# Altium PCB NRF_Transciever.PcbDoc (part 2 of 2)
Units mm, origin at the board's own origin, x right, y up, seen from the top; angles counter-clockwise.
Board outline 46.03 x 45.87 mm, 4 copper layers (Top Layer, Layer 1, Layer 2, Bottom Layer), stack 1.021 mm thick; 129 components, 92 nets, 321 pads, 297 vias.
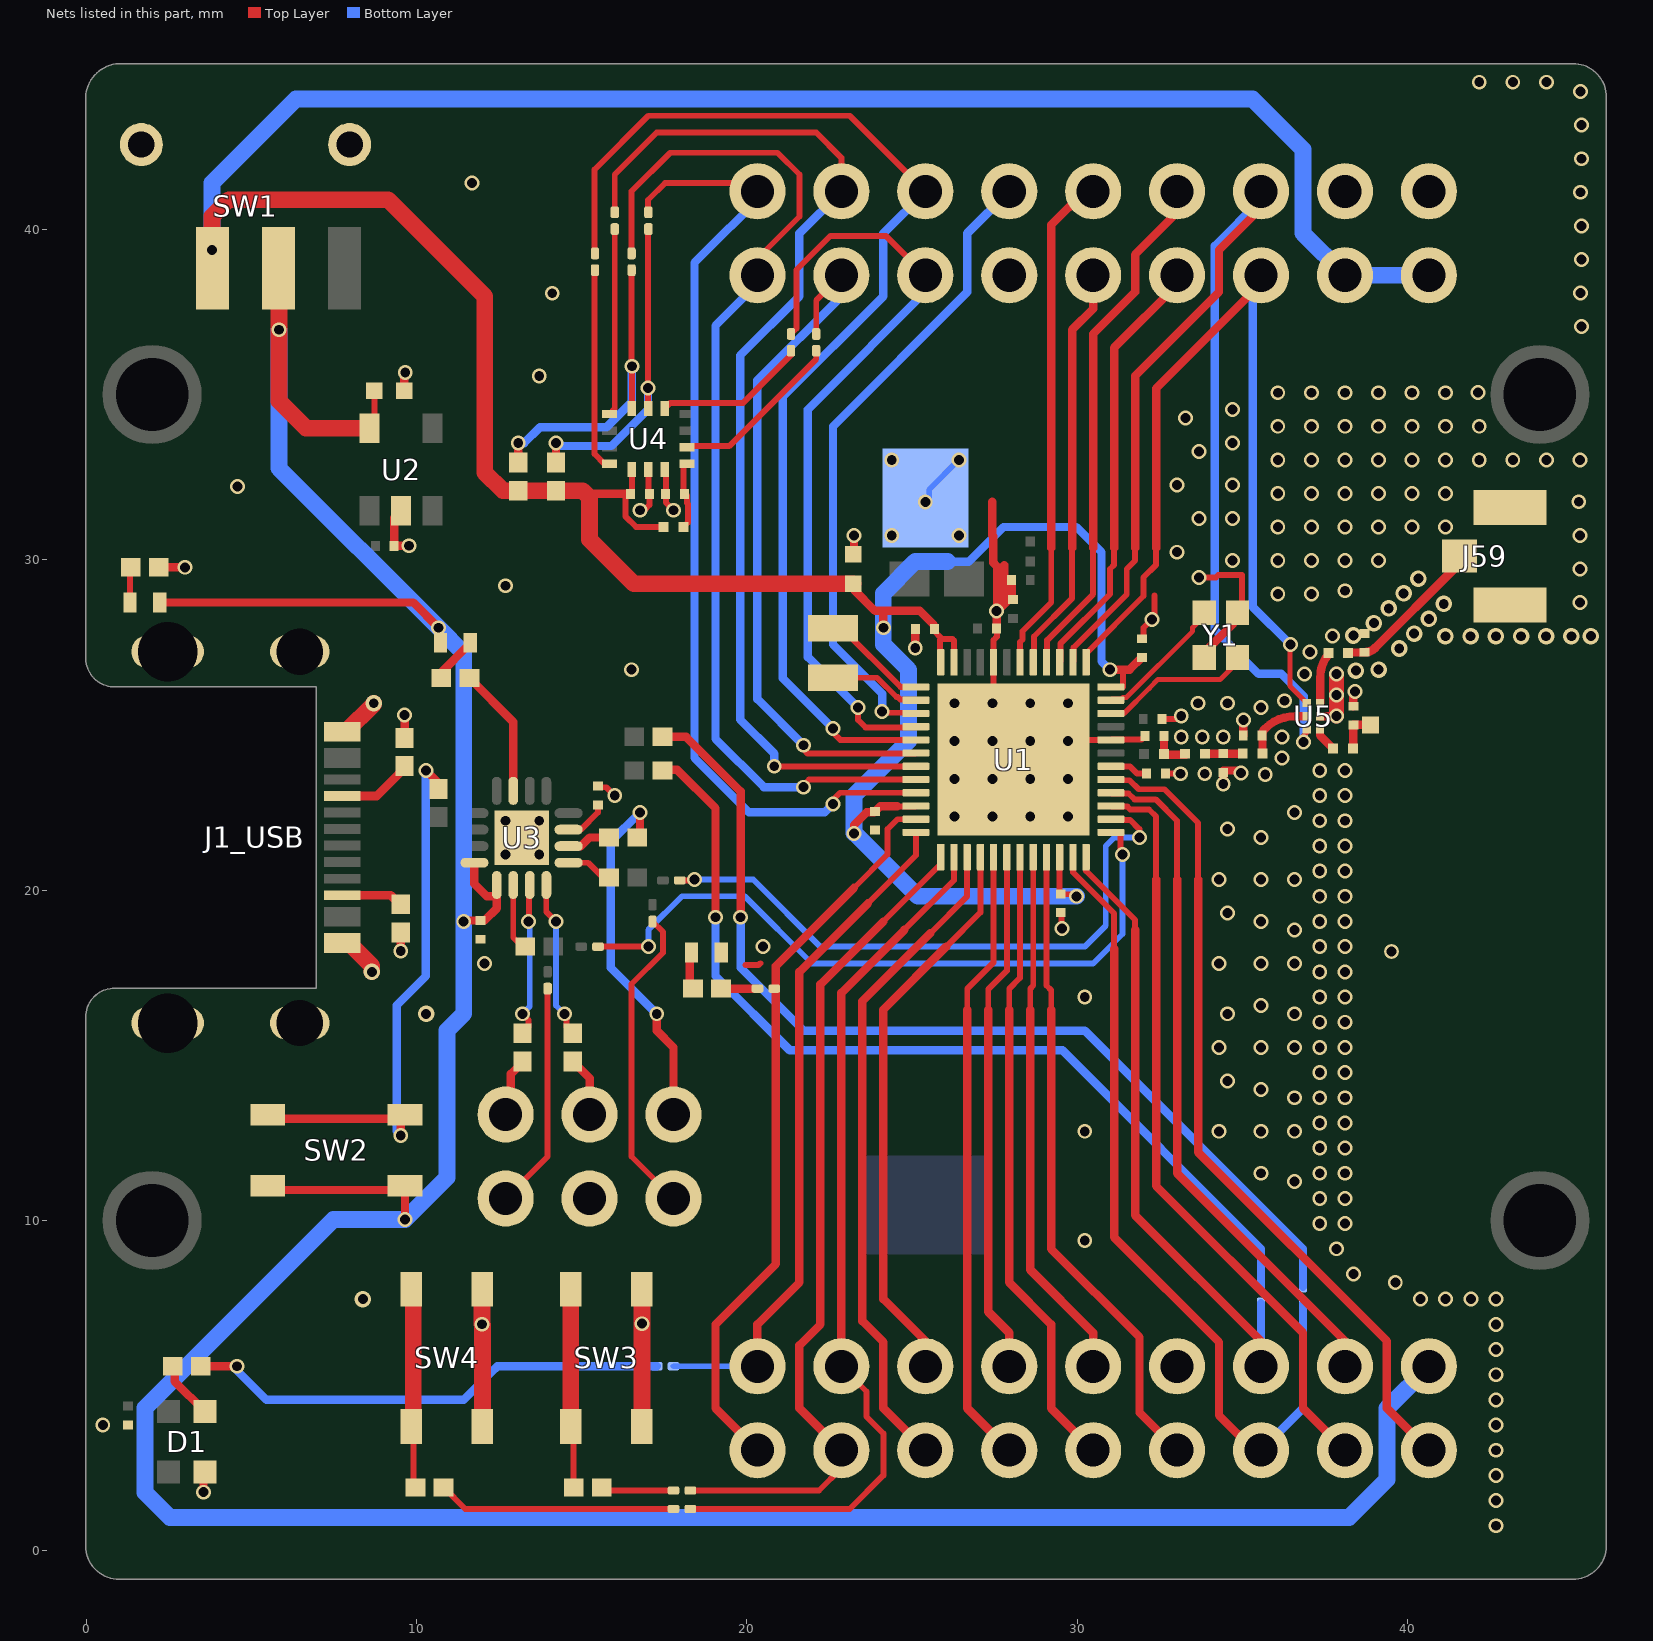
[diagram p4: the nets of this part, all layers, seen from the top]

## Via types
v1: diameter 0.45, hole 0.3, Top Layer to Bottom Layer, 263 vias
v2: diameter 0.5, hole 0.3, Top Layer to Bottom Layer, 34 vias

## Nets (pads, with @x,y where several pads share a name; then routed paths per layer and width w, separated by ;. In a path a pad name is that pad's centre, name@x,y a point inside that pad or via, vN(x,y) a via of type N, cw(c..) or ccw(c..) an arc to the next point about the centre after c; other vN are vias at no path point) (continued)
GND: A1.2 BT1.1 C1.1 C2.1 C3.1 C4.1 C5.1 C6.1 C7.1 C8.1 C9.1 C10.1 C11.1 C12.1 C13.1 C14.1 C15.1 C16.1 C17.1 C18.1 C19.1 C20.1 C21.1 C22.1 D1.2 DS3.2 J1_USB.1 J1_USB.2 J1_USB.3 J1_USB.4 J1_USB.A1-B12 J1_USB.B1-A12 J18.1 J19.1 J35.1 J36.1 J50.1 J59.2 J59.3 R2.1 R3.1 R7.1 SW1.4 SW1.5 SW3.3 SW3.4 SW4.3 SW4.4 U1.32 U1.44 U1.49 U2.2 U3.17 U4.6 U4.7 U5.2 Y1.2 Y1.4 | length 50.4
  Top Layer w0.178: C17.1@15.498,23.114 15.748,23.114 v1(16.002,22.86) ; v1(16.764,31.496) 16.891,31.496 17.049,31.654 C18.1@17.049,31.989 ; U4.6@17.018,32.73 17.018,32.01 C18.1@17.039,31.989 ; U4.7@17.518,32.73 17.547,32.701 17.547,31.729 v1(17.78,31.496) ; 19.959,17.735 20.355,17.735 20.407,17.787 ; v2(27.432,25.654) 27.838,25.248 U1.49@28.017,25.248 ; C6.1@27.565,27.915 27.565,27.666 27.467,27.568 U1.44@27.467,26.895 27.467,25.654 27.432,25.619 v2(27.432,24.511) 27.559,24.511 28.067,24.003 U1.49@28.067,23.945 ; U1.49@28.144,23.92 28.738,24.514 U1.49@29.287,24.514 ; U1.49@29.287,23.978 29.389,23.876 29.433,23.876 U1.49@30.096,24.539 ; C4.1@29.503,19.321 29.521,19.304 29.521,18.857 v1(29.542,18.835) ; U1.49@30.102,24.545 U1.32@31.017,24.545 31.031,24.56 31.947,24.56 C7.1@31.996,24.608 ; C2.1@32.004,27.707 32.004,27.94 v1(32.258,28.194) 32.336,28.272 32.336,28.914 ; C12.1@32.567,25.176 33.05,25.176 v1(33.147,25.273) ; C13.1@32.654,23.523 33.119,23.523 v1(33.122,23.52) ; v1(33.684,29.464) 34.193,29.464 34.265,29.535 34.981,29.535 34.981,28.528 Y1.4@34.843,28.39
  Top Layer w0.254: R2.1@2.203,29.769 v1(2.997,29.769) ; v1(3.556,1.778) D1.2@3.556,2.286 ; C15.1@9.325,30.415 9.325,31.271 U2.2@9.533,31.478 ; C15.1@9.333,30.415 9.768,30.415 v1(9.774,30.421) ; v1(9.525,18.161) R7.1@9.525,18.721 ; C14.1@9.628,35.11 9.628,35.638 v1(9.66,35.669) ; R3.1@9.643,24.604 v1(9.643,25.301) ; C1.1@23.241,30.168 v1(23.241,30.734) ; v1(25.095,27.33) C5.1@25.095,27.887 ; v2(26.289,25.654) 26.543,25.4 27.178,25.4 v2(27.432,25.654) ; 27.432,31.75 27.432,30.734 27.461,30.705 27.461,29.906 27.575,29.792 27.575,28.464 v1(27.559,28.448) ; C6.1@27.565,27.915 27.565,28.442 v1(27.559,28.448) ; 27.791,28.758 27.791,29.84 ; C11.1@28.015,28.814 C10.1@28.015,29.275 ; C11.1@28.049,28.781 27.919,28.781 27.586,28.448 v1(27.559,28.448) ; Y1.2@33.843,27.04 33.843,27.191 34.722,28.07 34.722,28.269 Y1.4@34.843,28.39 ; v1(34.417,23.216) 34.417,23.618 34.878,23.618 v1(34.95,23.546) ; C9.1@35.021,24.673 35.021,25.141 v1(35.027,25.146) ; U5.2@37.346,25.263 37.836,25.263 v1(37.846,25.273) ; C22.1@38.354,25.564 v1@38.357,26.003
  Top Layer w0.457: v1(37.846,25.273) v1(37.846,26.543)
  Top Layer w0.508: J1_USB.B1-A12@7.62,18.394 7.956,18.394 8.649,17.701 v2(8.649,17.526) ; J1_USB.A1-B12@7.62,24.794 7.87,24.794 8.709,25.633 v2(8.709,25.654) ; SW4.4@11.984,7.853 v1(11.984,6.862) 12,6.846 SW4.3@12,3.77 ; SW3.3@16.823,3.767 v1@16.823,6.871 ; SW3.4@16.823,7.917 16.823,6.883 v1(16.829,6.877)
  Bottom Layer w0.178: BT1.1@25.4,31.868 25.518,31.868 25.518,32.122 v1(26.416,33.02)
  other v1: 42.672,0.762 42.672,1.524 42.672,2.286 42.672,3.048 0.508,3.81 42.672,3.81 42.672,4.572 42.672,5.334 42.672,6.096 42.672,6.858 40.386,7.62 41.148,7.62 41.91,7.62 42.672,7.62 39.624,8.128 38.354,8.382 37.846,9.144 30.226,9.398 37.338,9.906 38.1,9.906 37.338,10.668 38.1,10.668 36.576,11.176 35.56,11.43 37.338,11.43 38.1,11.43 37.338,12.192 38.1,12.192 30.226,12.7 34.29,12.7 35.56,12.7 36.576,12.7 37.338,12.954 38.1,12.954 36.576,13.716 37.338,13.716 38.1,13.716 35.56,13.97 34.544,14.224 37.338,14.478 38.1,14.478 34.29,15.24 35.56,15.24 36.576,15.24 37.338,15.24 38.1,15.24 37.338,16.002 38.1,16.002 34.544,16.256 36.576,16.256 35.56,16.51 30.226,16.764 37.338,16.764 38.1,16.764 37.338,17.526 38.1,17.526 12.065,17.78 34.29,17.78 35.56,17.78 36.576,17.78 20.49,18.295 37.338,18.288 38.1,18.288 36.576,18.796 35.56,19.05 37.338,19.05 38.1,19.05 34.544,19.304 37.338,19.812 38.1,19.812 34.29,20.32 35.56,20.32 36.576,20.32 37.338,20.574 38.1,20.574 12.7,21.082 13.716,21.082 37.338,21.336 38.1,21.336 35.56,21.59 34.544,21.844 12.7,22.098 13.716,22.098 37.338,22.098 38.1,22.098 28.575,22.225 36.576,22.352 37.338,22.86 38.1,22.86 28.575,23.368 35.687,23.495 33.858,23.52 37.338,23.622 38.1,23.622 36.195,24.003 28.575,24.511 33.147,24.638 33.782,24.638 34.417,24.638 36.195,24.638 35.56,25.527 28.575,25.654 33.655,25.654 34.544,25.654 36.272,25.731 37.846,25.908 38.405,26.01 36.877,26.543 16.51,26.67 37.046,27.201 37.719,27.686 45.212,28.702 36.068,28.956 37.084,28.956 38.098,29.06 12.7,29.21 45.212,29.718 34.7,29.972 36.068,29.972 37.084,29.972 38.1,29.972 39.116,29.972 33.02,30.226 24.384,30.734 26.416,30.734 45.212,30.734 36.068,30.988 37.084,30.988 38.1,30.988 39.116,30.988 40.132,30.988 41.148,30.988 33.684,31.242 34.7,31.242 25.4,31.75 45.176,31.753 36.068,32.004 37.084,32.004 38.1,32.004 39.116,32.004 40.132,32.004 41.148,32.004 4.585,32.209 33.02,32.258 34.7,32.258 24.384,33.02 36.068,33.02 37.084,33.02 38.1,33.02 39.116,33.02 40.132,33.02 41.148,33.02 42.164,33.02 43.18,33.02 44.196,33.02 45.212,33.02 33.684,33.269 34.7,33.528 36.068,34.036 37.084,34.036 38.1,34.036 39.116,34.036 40.132,34.036 41.148,34.036 42.164,34.036 33.274,34.29 34.7,34.544 36.068,35.052 37.084,35.052 38.1,35.052 39.116,35.052 40.132,35.052 41.148,35.052 42.128,35.055 13.716,35.56 45.264,37.053 14.11,38.064 45.228,38.072 45.264,39.085 45.264,40.101 45.228,41.12 11.684,41.402 45.264,42.133 45.264,43.149 45.228,44.168 42.164,44.45 43.18,44.45 44.196,44.45
  other v2: 8.382,7.62 10.291,16.256 26.289,22.225 27.432,22.225 29.718,22.225 26.289,23.368 27.432,23.368 29.718,23.368 26.289,24.511 29.718,24.511 29.718,25.654 38.43,26.645 39.116,26.67 39.745,27.311 41.143,27.683 41.905,27.683 42.667,27.683 43.429,27.683 44.191,27.683 44.953,27.683 45.542,27.686 38.354,27.705 40.194,27.76 38.977,28.079 40.643,28.209 39.426,28.528 41.092,28.658 39.875,28.977 40.324,29.426
IMU_CSB: J39.1 U4.12 | length 4.5
  Top Layer w0.178: U4.12@17.518,34.58 17.684,34.746 19.887,34.746 J39.1@21.374,36.233
IMU_SCL: J37.1 R13.1 U4.13 | length 9.9
  Top Layer w0.178: J37.1@17.008,39.896 v1(17.008,35.198) 17.008,34.634 U4.13@17.018,34.624
  Top Layer w0.254: R13.1@14.224,32.937 v1(14.224,33.528)
  Bottom Layer w0.254: v1(14.224,33.528) 14.204,33.508 14.204,33.439 15.897,33.439 17.008,34.55 v1(17.008,35.198)
IMU_SDA: J38.1 R14.1 U4.14 | length 10
  Top Layer w0.178: J38.1@16.51,38.829 16.51,35.86 v1(16.518,35.852) U4.14@16.518,34.58
  Top Layer w0.254: R14.1@13.081,32.937 13.208,33.064 13.081,33.191 v1(13.081,33.528)
  Bottom Layer w0.254: v1(13.081,33.528) 13.261,33.528 13.74,34.007 15.746,34.007 16.518,34.779 v1(16.518,35.852)
NetC7_2: C7.2 L2.2 L3.1 | length 1.2
  Top Layer w0.254: L2.2@32.625,24.12 C7.2@32.625,24.663 ; L2.2@32.672,24.101 L3.1@33.287,24.101
NetC8_2: C8.2 L3.2 L4.1 | length 1.1
  Top Layer w0.254: L3.2@33.942,24.127 34.615,24.127 L4.1@35.006,24.127
NetC13_2: C13.2 U1.30 | length 1.2
  Top Layer w0.178: U1.30@31.017,23.745 31.592,23.745 31.814,23.523 C13.2@32.104,23.523
NetC17_2: C17.2 U3.7 | length 1.3
  Top Layer w0.178: U3.7@14.605,21.828 14.97,21.828 15.494,22.352 C17.2@15.494,22.575
NetD1_3: D1.3 R16.2 | length 1.5
  Top Layer w0.254: 2.683,5.302 2.683,5.132 D1.3@3.598,4.217
NetDS1_2: DS1.2 R2.2 | length 1
  Top Layer w0.178: DS1.2@1.328,28.702 1.328,29.693 R2.2@1.353,29.718
NetDS2_2: DS2.2 R12.2 | length 1.3
  Top Layer w0.254: R12.2@10.751,26.416 10.751,26.584 DS2.2@11.549,27.382
NetDS3_1: DS3.1 R17.1 | length 1.2
  Top Layer w0.254: R17.1@18.244,17.018 R17.1@18.315,16.948 ; DS3.1@18.271,18.04 18.271,17.118 R17.1@18.371,17.018
NetJ1_USB_A5: J1_USB.A5 R3.2 | length 2.2
  Top Layer w0.267: J1_USB.A5@7.62,22.844 8.791,22.844 9.475,23.528 R3.2@9.525,23.578
NetJ1_USB_B5: J1_USB.B5 R7.2 | length 2
  Top Layer w0.267: J1_USB.B5@7.62,19.844 9.223,19.844 R7.2@9.496,19.571
NetJ40_2: J40.2 U4.1 | length 5.7
  Top Layer w0.178: U4.1@15.843,34.405 16.002,34.564 J40.2@16.002,40
NetJ41_1: J41.1 U4.9 | length 5.1
  Top Layer w0.178: U4.9@18.319,33.434 19.464,33.434 22.098,36.068 J41.1@22.098,36.322
NetJ42_2: J42.2 U4.4 | length 5.9
  Top Layer w0.178: 15.392,38.57 15.392,33.2 15.688,32.905 U4.4@15.843,32.905
NetJ43_2: J43.2 R17.2 | length 1.1
  Top Layer w0.254: R17.2@19.221,17.018 J43.2@20.32,17.018
NetJ44_2: J44.2 R16.1 | length 14.8
  Top Layer w0.254: R16.1@3.361,5.588 v1(4.572,5.588)
  Bottom Layer w0.254: v1(4.572,5.588) 4.572,5.461 5.461,4.572 11.43,4.572 12.192,5.334 12.268,5.41 12.446,5.588 J44.2@17.272,5.588
NetJ45_2: J45.2 R18.2 | length 2.3
  Top Layer w0.178: R18.2@15.545,1.95 15.666,1.829 J45.2@17.78,1.829
NetJ46_2: J46.2 R19.2 | length 7.2
  Top Layer w0.178: R19.2@10.822,1.923 11.475,1.27 J46.2@17.78,1.27
NetJ48_1: J48.1 J55.1 | length 9.4
  Top Layer w0.178: J55.1@17.145,19.05 17.459,18.736 17.459,18.105 16.51,17.156 16.51,11.938 J48.1@17.78,10.668
NetJ52_1: J52.1 J56.1 | length 6.9
  Top Layer w0.178: J52.1@12.7,10.668 13.97,11.938 J56.1@13.97,17.018
NetJ53_1: J53.1 U1.26 | length 18.8
  Top Layer w0.178: J53.1@17.969,20.292 18.387,20.292 v1(18.415,20.32) ; U1.26@31.017,22.145 31.038,22.124 31.597,22.124 31.877,21.844 v1(31.877,21.59)
  Bottom Layer w0.178: v1(18.415,20.32) 20.193,20.32 22.225,18.288 30.226,18.288 30.861,18.923 30.861,21.336 31.115,21.59 v1(31.877,21.59)
NetJ54_1: J54.1 U1.25 | length 21.4
  Top Layer w0.178: J54.1@15.494,18.288 v1(17.018,18.288) ; U1.25@31.017,21.745 31.284,21.745 31.306,21.724 31.306,21.092 31.316,21.082 v1(31.369,21.082)
  Bottom Layer w0.178: v1(17.018,18.288) 17.018,18.796 18.034,19.812 19.939,19.812 21.971,17.78 30.48,17.78 31.369,18.669 v1(31.369,21.082)
NetJ57_2: J57.2 R10.2 | length 30.1
  Top Layer w0.254: R10.2@17.443,24.638 18.161,24.638 19.812,22.987 v1(19.812,19.177)
  Bottom Layer w0.254: v1(19.812,19.177) 19.812,17.653 21.717,15.748 30.226,15.748 36.83,9.144 J57.2@36.83,8.001
NetJ58_2: J58.2 R11.1 | length 28.2
  Top Layer w0.254: R11.1@17.443,23.622 17.457,23.636 17.893,23.636 19.05,22.479 v1(19.05,19.177)
  Bottom Layer w0.254: v1(19.05,19.177) 19.05,17.399 21.297,15.152 29.552,15.152 35.56,9.144 J58.2@35.56,8.001
NetL7_1: L7.1 U5.3 | length 1.5
  Top Layer w0.254: U5.3@37.346,25.663 37.356,25.673 37.356,26.446 cw(c38.597,26.446) 37.368,26.62 cw(c38.339,26.483) L7.1@37.614,27.142
NetL8_1: L8.1 U5.1 | length 0.7
  Top Layer w0.254: U5.1@37.346,24.863 37.346,24.681 L8.1@37.744,24.282
NetR4_1: R4.1 U3.4 | length 4.8
  Top Layer w0.178: U3.4@13.93,20.153 13.93,19.344 v1(14.224,19.05) ; v1(14.478,16.256) 14.478,16.182 14.546,16.114 14.546,15.851 R4.1@14.732,15.665
  Bottom Layer w0.178: v1(14.224,19.05) 14.224,16.51 v1(14.478,16.256)
NetR5_1: R5.1 U3.3 | length 4.8
  Top Layer w0.178: R5.1@13.208,15.665 13.394,15.851 13.394,16.07 v1(13.208,16.256) ; v1(13.393,19.05) 13.412,19.069 13.412,20.135 U3.3@13.43,20.153
  Bottom Layer w0.178: v1(13.208,16.256) 13.428,16.476 13.428,19.015 v1(13.393,19.05)
NetR6_1: R6.1 U3.2 | length 2
  Top Layer w0.178: U3.2@12.93,20.153 12.93,18.566 R6.1@13.208,18.288
NetR8_1: R8.1 U3.5 | length 1.4
  Top Layer w0.178: U3.5@14.605,20.828 15.196,20.828 15.639,20.385 R8.1@15.831,20.385
NetR9_1: R9.1 U3.6 | length 1.3
  Top Layer w0.254: U3.6@14.605,21.328 14.978,21.328 15.24,21.59 R9.1@15.831,21.59
NetR12_1: R12.1 U3.11 | length 4
  Top Layer w0.254: R12.1@11.601,26.416 12.93,25.087 U3.11@12.93,23.003
NetR15_2: R15.2 SW2.1 SW2.2 | length 17.1
  Top Layer w0.254: SW2.1@5.502,13.199 5.62,13.081 9.534,13.081 SW2.2@9.652,13.199 9.525,13.072 v1(9.525,12.573) ; v1(10.287,23.622) 10.672,23.237 R15.2@10.672,23.061
  Bottom Layer w0.254: v1(9.525,12.573) 9.398,12.7 9.398,16.51 10.287,17.399 v1(10.287,23.622)
NetR18_1: R18.1 SW3.1 SW3.2 | length 6
  Top Layer w0.178: SW3.1@14.673,3.767 14.758,3.682 R18.1@14.758,1.923
  Top Layer w0.508: SW3.1@14.673,3.767 SW3.2@14.673,7.917
NetR19_1: R19.1 SW4.1 SW4.2 | length 5.5
  Top Layer w0.178: R19.1@9.906,1.945 SW4.1@9.906,3.556
  Top Layer w0.508: SW4.1@9.906,3.556 SW4.2@9.906,7.467
NetU1_1: U1.1 Y2.2 | length 3.2
  Top Layer w0.178: Y2.2@22.606,27.928 22.872,27.928 24.655,26.145 U1.1@25.117,26.145
NetU1_2: U1.2 Y2.1 | length 2.8
  Top Layer w0.178: Y2.1@22.606,26.428 23.941,26.428 24.528,25.841 24.567,25.841 24.641,25.767 25.096,25.767 U1.2@25.117,25.745
P0.02: J25.1 U1.27 | length 23
  Top Layer w0.178: U1.27@31.017,22.545 31.038,22.524 31.52,22.524 31.603,22.441 32.169,22.441 32.385,22.225 32.385,20.32
  Top Layer w0.254: 32.385,20.32 32.385,11.049 36.83,6.604 36.83,4.318 J25.1@38.1,3.048
P0.03: J28.1 U1.28 | length 21
  Top Layer w0.178: U1.28@31.017,22.945 31.038,22.924 31.551,22.924 31.729,22.746 32.372,22.746 33.02,22.098 33.02,20.32
  Top Layer w0.254: 33.02,20.32 33.02,11.43 38.1,6.35 J28.1@38.1,5.588
P0.04: J30.1 U1.29 | length 25.1
  Top Layer w0.178: U1.29@31.017,23.345 31.038,23.324 31.582,23.324 31.856,23.05 32.639,23.05 33.655,22.034 33.655,20.32
  Top Layer w0.254: 33.655,20.32 33.655,12.065 39.37,6.35 39.37,4.318 J30.1@40.64,3.048
P1.02: J1.1 U1.3 | length 19.6
  Top Layer w0.178: v1(24.092,25.4) 24.126,25.367 25.096,25.367 U1.3@25.117,25.345
  Bottom Layer w0.254: v1(24.092,25.4) 24.092,25.946 22.606,27.432 22.606,34.036 26.67,38.1 26.67,39.878 J1.1@27.94,41.148
P1.03: J3.1 J39.2 U1.4 | length 24.5
  Top Layer w0.178: J39.2@21.336,36.83 21.499,36.993 21.499,38.771 22.529,39.801 24.207,39.801 J3.1@25.4,38.608 ; v1(23.368,25.527) 23.368,25.146 23.588,24.926 25.097,24.926 U1.4@25.117,24.945
  Bottom Layer w0.254: v1(23.368,25.527) 21.844,27.051 21.844,34.544 25.653,38.353 J3.1@25.4,38.606
P1.04: J5.1 J42.1 U1.5 | length 35.5
  Top Layer w0.178: J42.1@15.392,39.378 15.392,41.808 17.018,43.434 23.114,43.434 J5.1@25.4,41.148 ; v1(22.606,24.892) 22.606,24.765 22.826,24.545 25.108,24.545 U1.5@25.113,24.541
  Bottom Layer w0.254: v1(22.606,24.892) 21.082,26.416 21.082,34.925 24.13,37.973 24.13,39.878 J5.1@25.4,41.148
P1.05: J7.1 J41.2 U1.6 | length 21.3
  Top Layer w0.178: v1(21.717,24.384) 21.717,24.257 21.844,24.13 25.102,24.13 U1.6@25.117,24.145 ; 22.099,37.02 22.099,37.847 J7.1@22.86,38.608
  Bottom Layer w0.254: v1(21.717,24.384) 20.32,25.781 20.32,35.433 22.86,37.973 J7.1@22.86,38.608
P1.06: J9.1 J40.1 U1.7 | length 33.2
  Top Layer w0.178: J40.1@16.002,40.513 16.002,41.656 17.272,42.926 22.098,42.926 22.86,42.164 J9.1@22.86,41.148 ; v1(20.83,23.747) v1(20.83,23.747) U1.7@25.117,23.745
  Bottom Layer w0.254: v1(20.83,23.747) 20.83,24.128 19.796,25.162 19.796,36.179 21.59,37.973 21.59,39.878 J9.1@22.86,41.148
P1.07: J11.1 J38.2 U1.8 | length 32.3
  Top Layer w0.178: J38.2@16.51,39.37 16.51,41.148 17.678,42.316 20.93,42.316 21.59,41.656 21.59,40.386 20.32,39.116 J11.1@20.32,38.608 ; v1(21.717,23.114) 21.717,23.178 21.885,23.345 U1.8@25.117,23.345
  Bottom Layer w0.254: J11.1@20.32,38.354 19.05,37.084 19.05,24.576 20.512,23.114 v1(21.717,23.114)
P1.08: J13.1 J37.2 U1.9 | length 29.8
  Top Layer w0.178: J37.2@17.018,40.513 17.008,40.523 17.008,40.884 17.526,41.402 20.066,41.402 J13.1@20.32,41.148 ; v1(22.606,22.606) 22.606,22.733 22.818,22.945 U1.9@25.117,22.945
  Bottom Layer w0.254: J13.1@20.574,41.148 18.415,38.989 18.415,24.003 20.066,22.352 22.352,22.352 v1(22.606,22.606)
P1.09: J15.1 U1.37 U5.4 | length 27.6
  Top Layer w0.152: v1(36.449,27.432) 36.436,27.419 36.436,26.173 U5.4@36.946,25.663
  Top Layer w0.178: U1.37@30.267,26.895 30.267,27.163 32.004,28.9 32.004,29.464 32.385,29.845 32.385,30.353
  Top Layer w0.254: 32.385,30.353 32.385,35.179 35.56,38.354 J15.1@35.56,38.608
  Bottom Layer w0.254: J15.1@35.56,38.608 35.306,38.354 35.306,28.575 v1(36.449,27.432)
P1.10: J20.1 U1.38 U5.6 | length 35.9
  Top Layer w0.152: v1(36.848,24.476) 36.848,24.483 36.754,24.578 36.946,24.77 U5.6@36.946,24.863
  Top Layer w0.178: U1.38@29.867,26.895 29.888,26.917 29.888,27.341 31.496,28.948 31.496,29.718 31.75,29.972 31.75,30.353
  Top Layer w0.254: 31.75,30.353 31.75,35.56 34.29,38.1 34.29,39.37 35.56,40.64 J20.1@35.56,41.148
  Bottom Layer w0.254: J20.1@35.56,41.148 35.56,40.894 34.163,39.497 34.163,29.832 34.163,27.866 35.486,26.543 36.175,26.543 36.848,25.87 v1(36.848,24.476)
P1.11: J23.1 U1.39 | length 13.2
  Top Layer w0.178: U1.39@29.467,26.895 29.488,26.917 29.488,27.456 30.988,28.956 30.988,29.718 31.115,29.845 31.115,30.353
  Top Layer w0.254: 31.115,30.353 31.115,36.413 33.02,38.318 J23.1@33.02,38.608
P1.12: J26.1 U1.40 | length 15.9
  Top Layer w0.178: U1.40@29.067,26.895 29.088,26.917 29.088,27.564 30.48,28.956 30.48,30.353
  Top Layer w0.254: 30.48,30.353 30.48,36.83 31.75,38.1 31.75,39.231 33.02,40.501 J26.1@33.02,41.148
P1.13: J29.1 U1.41 | length 12.5
  Top Layer w0.178: U1.41@28.667,26.895 28.688,26.917 28.688,27.672 29.845,28.829 29.845,30.353
  Top Layer w0.254: 29.845,30.353 29.845,36.957 30.48,37.592 J29.1@30.48,38.608
P1.14: J31.1 U1.42 | length 15.3
  Top Layer w0.178: U1.42@28.267,26.895 28.267,27.506 28.341,27.58 28.341,27.833 29.21,28.702 29.21,30.353
  Top Layer w0.254: 29.21,30.353 29.21,40.132 30.226,41.148 J31.1@30.48,41.148
P2.00: J2.1 J43.1 U1.11 | length 22.5
  Top Layer w0.178: 23.241,20.066 24.257,21.082 24.257,21.844 24.558,22.145 U1.11@25.117,22.145
  Top Layer w0.254: J2.1@20.32,3.048 19.05,4.318 19.05,6.858 20.879,8.687 20.879,11.684 20.879,13.462 20.879,13.598 20.879,14.342 20.879,17.154 20.879,17.704 23.241,20.066
P2.01: J4.1 J44.1 U1.12 | length 20.7
  Top Layer w0.178: 23.664,19.6 25.117,21.053 U1.12@25.117,21.745
  Top Layer w0.254: J4.1@20.32,5.588 20.32,6.858 21.59,8.128 21.59,17.526 23.664,19.6
  Bottom Layer w0.178: J44.1@17.78,5.588 J4.1@20.32,5.588
P2.02: J6.1 J45.1 U1.13 | length 25.6
  Top Layer w0.152: J6.1@22.86,2.504 J6.1@22.86,3.048
  Top Layer w0.178: J45.1@18.288,1.829 22.185,1.829 J6.1@22.86,2.504 ; 24.13,19.05 25.867,20.787 U1.13@25.867,20.995
  Top Layer w0.254: J6.1@22.86,3.048 21.59,4.318 21.59,6.223 22.225,6.858 22.225,17.145 24.13,19.05
P2.03: J8.1 J46.1 U1.14 | length 26.9
  Top Layer w0.178: J46.1@18.288,1.27 23.114,1.27 24.13,2.286 24.13,3.556 23.622,4.064 23.622,4.826 J8.1@22.86,5.588 ; 24.765,18.796 26.267,20.298 U1.14@26.267,20.995
  Top Layer w0.254: J8.1@22.86,5.588 22.86,16.891 24.765,18.796
P2.04: J10.1 U1.15 | length 20.1
  Top Layer w0.178: 25.547,18.689 26.667,19.809 U1.15@26.667,20.995
  Top Layer w0.254: J10.1@25.4,3.048 24.13,4.318 24.13,6.319 23.495,6.954 23.495,16.637 25.547,18.689
P2.05: J12.1 U1.16 | length 17.2
  Top Layer w0.178: 26.035,18.288 27.067,19.32 U1.16@27.067,20.995
  Top Layer w0.254: J12.1@25.4,5.588 25.4,6.35 24.13,7.62 24.13,16.383 26.035,18.288
P2.06: J14.1 U1.17 | length 18.8
  Top Layer w0.178: 26.67,16.384 26.67,17.018 27.467,17.815 U1.17@27.467,20.995
  Top Layer w0.254: 26.67,16.384 26.67,4.318 J14.1@27.94,3.048
P2.07: J16.1 U1.18 | length 15.9
  Top Layer w0.178: 27.305,16.383 27.305,16.998 27.867,17.56 U1.18@27.867,20.995
  Top Layer w0.254: 27.305,16.383 27.305,7.239 27.94,6.604 J16.1@27.94,5.588
P2.08: J21.1 U1.19 | length 19.1
  Top Layer w0.178: 27.94,16.383 27.94,17.018 28.267,17.345 28.267,19.254 U1.19@28.267,20.995
  Top Layer w0.254: 27.94,16.383 27.94,8.128 29.21,6.858 29.21,4.318 J21.1@30.48,3.048
P2.09: J24.1 U1.20 | length 16.2
  Top Layer w0.178: 28.575,16.383 28.575,17.018 28.667,17.11 28.667,19.223 U1.20@28.667,20.995
  Top Layer w0.254: 28.575,16.383 28.575,8.509 30.48,6.604 J24.1@30.48,5.588
P2.10: J27.1 U1.21 | length 19.6
  Top Layer w0.178: U1.21@29.067,20.995 29.067,20.109 29.067,17.11 29.21,16.967 29.21,16.383
  Top Layer w0.254: 29.21,16.383 29.21,9.144 31.882,6.472 31.882,4.186 J27.1@33.02,3.048
RF_Co-ax: C21.2 J59.1 L7.2 | length 4.7
  Top Layer w0.254: L7.2@38.197,27.178 C21.2@38.696,27.197
  Top Layer w0.264: C21.2@38.696,27.197 ccw(c38.696,27.644) 39.012,27.328 41.411,29.727 ccw(c41.032,30.106) J59.1@41.568,30.106
RF_IFA: A1.1 C22.2 L8.2 | length 1.2
  Top Layer w0.254: L8.2@38.344,24.282 38.354,24.292 C22.2@38.354,24.994 38.36,25 A1.1@38.873,25
RF_OUT: C9.2 L4.2 U5.5 | length 2.1
  Top Layer w0.254: C9.2@35.591,24.673 cw(c35.889,24.673) 35.678,24.883 cw(c36.595,23.967) 36.595,25.263 U5.5@36.946,25.263 ; C9.2@35.599,24.65 35.606,24.643 L4.2@35.606,24.13
RST: J51.1 R9.2 | length 11.2
  Top Layer w0.254: R9.2@16.681,21.507 16.764,21.59 v1(16.764,22.352) ; v1(17.272,16.256) 17.272,15.748 17.78,15.24 J51.1@17.78,13.208
  Bottom Layer w0.254: v1(16.764,22.352) 15.875,21.463 15.875,17.653 v1(17.272,16.256)
TDI: J47.1 R4.2 | length 1.8
  Top Layer w0.254: R4.2@14.732,14.815 15.24,14.307 J47.1@15.24,13.208
TDO: J49.1 R5.2 | length 1.8
  Top Layer w0.254: J49.1@12.7,13.208 12.857,13.365 12.857,14.439 13.208,14.79 R5.2@13.208,14.815
UART_RX: J22.1 J58.1 U1.24 | length 19.5
  Top Layer w0.178: U1.24@30.267,20.995 30.267,20.575 31.75,19.092 31.75,18.796
  Top Layer w0.254: 31.75,18.796 31.75,10.16 35.56,6.35 J22.1@35.56,5.588
  Bottom Layer w0.254: J22.1@35.56,5.588 J58.1@35.56,7.493
UART_TX: J17.1 J57.1 U1.23 | length 25.4
  Top Layer w0.178: U1.23@29.867,20.995 29.867,20.541 31.115,19.293 31.115,18.226
  Top Layer w0.254: 31.115,18.226 31.115,9.494 34.29,6.319 34.29,4.101 35.343,3.048 J17.1@35.56,3.048
  Bottom Layer w0.254: J17.1@35.56,3.048 36.83,4.318 J57.1@36.83,7.493
VCC_nRF: C1.2 C2.2 C3.2 C4.2 C5.2 C18.2 J32.1 J34.1 L6.2 R13.2 R14.2 SW1.3 U1.10 U1.22 U1.36 U1.47 U1.48 U4.5 | length 116.9
  Top Layer w0.178: C18.2@16.489,31.989 16.456,31.989 16.325,31.858 16.325,31.68 16.323,31.679 16.323,31.313 16.648,30.988 L6.2@17.48,30.988 ; C18.2@16.518,32.116 U4.5@16.518,32.73 ; 24.549,22.531 25.103,22.531 U1.10@25.117,22.545 ; C5.2@25.663,27.905 25.663,27.844 25.87,27.637 25.87,27.598 ; U1.48@25.867,26.895 25.843,26.92 25.843,27.571 25.87,27.598 ; U1.47@26.267,26.895 26.267,27.55 26.219,27.598 25.87,27.598 ; C4.2@29.467,19.93 U1.22@29.467,20.995 ; C4.2@29.499,19.876 29.908,19.876 v1(29.972,19.812) ; v1(30.988,26.67) v1@31.123,26.67 ; U1.36@31.017,26.145 31.383,26.145 31.383,26.67
  Top Layer w0.254: R14.2@12.998,32.087 R14.2@13.273,32.087 ; 15.128,31.989 C18.2@16.489,31.989 ; v1(23.241,21.717) 23.241,21.971 23.622,22.352 23.855,22.352 24.034,22.531 24.549,22.531 ; C1.2@23.241,29.268 23.241,29.088 23.881,28.448 24.13,28.448 ; v1(24.13,27.94) 24.13,28.448 ; C5.2@25.663,27.905 25.663,28.019 25.235,28.448 24.13,28.448 ; v1@31.123,26.67 31.383,26.67 31.586,26.67 C2.2@31.963,27.047
  Top Layer w0.508: SW1.3@3.81,38.227 3.81,38.621 v1(3.81,39.37) 3.81,40.386 4.318,40.894 9.144,40.894 12.065,37.973 12.065,32.639 12.617,32.087 R14.2@12.998,32.087 ; R14.2@13.273,32.087 R13.2@14.224,32.087 15.03,32.087 15.128,31.989 15.24,31.877 15.24,30.607 16.579,29.268 C1.2@23.216,29.268
  Bottom Layer w0.254: 26.33,29.943 26.721,29.943 27.766,30.988 29.972,30.988 30.734,30.226 30.734,26.924 v1(30.988,26.67)
  Bottom Layer w0.508: v1(3.81,39.37) 3.81,41.402 6.35,43.942 35.306,43.942 36.83,42.418 36.83,39.878 J32.1@38.1,38.608 J34.1@40.64,38.608 ; 26.08,29.943 25.093,29.943 24.13,28.98 v1(24.13,27.94) 24.13,27.432 24.892,26.67 24.892,24.511 23.241,22.86 v1(23.241,21.717) 23.269,21.717 25.174,19.812 v1(29.972,19.812)
VDD_3V3: C14.2 C16.2 DS1.1 DS2.1 J33.1 SW1.2 SW2.3 SW2.4 U2.5 U3.1 U3.16 | length 109.7
  Top Layer w0.178: U2.5@8.583,33.978 8.583,34.173 8.728,34.318 C14.2@8.728,35.11
  Top Layer w0.254: DS1.1@2.264,28.702 9.906,28.702 v1(10.668,27.94) ; SW2.3@5.52,10.922 SW2.4@9.525,10.922 ; v1(9.652,10.033) SW2.4@9.652,10.922 ; v1@10.676,27.932 10.676,27.79 10.726,27.74 DS2.1@10.726,27.485 DS2.1@10.726,27.432 ; v1(11.43,19.05) 11.461,19.081 C16.2@11.938,19.081 12.065,19.081 12.43,19.446 U3.1@12.43,19.812 ; U3.16@11.755,20.828 11.755,20.186 12.129,19.812 ; 12.192,19.812 12.129,19.812 ; U3.1@12.43,20.153 U3.1@12.43,19.812 ; 12.129,19.812 U3.1@12.43,19.812
  Top Layer w0.508: SW1.2@5.842,37.592 v1(5.842,36.957) 5.842,34.798 6.662,33.978 U2.5@8.583,33.978
  Bottom Layer w0.508: v1(5.842,36.957) 5.842,32.766 v1(10.668,27.94) 11.43,27.178 v1(11.43,19.05) 11.43,16.256 10.922,15.748 10.922,11.303 v1(9.652,10.033) 7.493,10.033 1.789,4.329 1.789,1.767 2.54,1.016 38.227,1.016 39.37,2.159 39.37,4.318 J33.1@40.64,5.588
VDD_A: C19.2 L6.1 U4.8 | length 2.1
  Top Layer w0.178: L6.1@18.08,30.988 18.221,31.129 18.221,31.679 18.186,31.713 18.186,31.938 18.148,31.976 18.077,31.976 18.077,32.789 U4.8@18.193,32.905
XC1: U1.34 Y1.3 | length 4.3
  Top Layer w0.152: U1.34@31.017,25.345 31.416,25.345 32.18,26.109 32.18,26.112 32.438,26.371 32.803,26.371 34.322,26.371 34.703,26.752 Y1.3@34.703,26.803
XC2: U1.35 Y1.1 | length 3.7
  Top Layer w0.152: U1.35@31.017,25.745 31.051,25.779 31.33,25.779 31.383,25.832 31.49,25.832 33.493,27.835 33.493,27.943 Y1.1@33.703,28.153
pads on no net: D1.1 J1_USB.A8 J1_USB.B8 M1. M2. M3. M4. U2.4 U3.8 U3.12 U3.13 U4.2 U4.3 U4.10 U4.11

## Polygon pours and split planes (outlines as drawn)
GND on Top Layer "GND_TOP_P070" (solid, remove dead copper, pour order 70): -2.54,45.72 48.26,45.72 48.26,-2.54 -2.54,-2.54
GND on Top Layer "GND_island" (solid, pour order 43): 33.561,23.833 33.561,23.3 34.043,22.817 34.831,22.817 35.288,23.274 35.313,23.274 35.313,23.833
GND on Layer 1 "GND_L02_P069" (solid, remove dead copper, pour order 69): -2.54,45.72 48.26,45.72 48.26,-2.54 -2.54,-2.54
GND on Layer 2 "GND_L02_P071" (solid, remove dead copper, pour order 71): -2.54,45.72 48.26,45.72 48.26,-2.54 -2.54,-2.54
GND on Bottom Layer "GND_BOTTOM_P072" (solid, remove dead copper, pour order 72): -2.54,45.72 48.26,45.72 48.26,-2.54 -2.54,-2.54

## Keep-outs
Top Layer:
  rectangle: 31.353,5.013 31.638,5.226
  rectangle: 12.446,18.796 12.817,19.304
  rectangle: 11.215,19.402 11.452,21.103
  rectangle: 23.622,29.014 24.28,30.226
  rectangle: 21.59,25.908 23.622,28.702
  rectangle: 38.505,18.39 45.974,27.278
  rectangle: 38.456,8.738 45.974,18.466
  rectangle: 38.506,16.568 39.268,24.036
  rectangle: 38.582,24.147 39.776,25.558
  rectangle: 16.266,33.209 17.841,34.228
  rectangle: 25.649,29.138 25.841,29.932
  rectangle: 32.785,26.106 35.459,29.154
Layer 1:
  rectangle: 40.135,8.622 46.015,17.51
  rectangle: 40.132,16.129 45.974,27.178
  rectangle: 0.513,16.709 7.07,26.416
Layer 2:
  rectangle: 40.129,8.654 45.988,17.544
  rectangle: 40.132,16.129 45.974,27.178
  rectangle: 0.291,16.764 7.106,26.443
Bottom Layer:
  rectangle: 22.865,27.432 23.742,27.539
  rectangle: 40.139,8.636 45.974,17.526
  rectangle: 40.132,16.129 45.974,27.178
Keep-Out Layer:
  rectangle: 42.926,-0.857 45.974,8.636

## Other copper
Top Layer:
  pour cut-out: 37.526,25.28 38.441,25.254 38.447,24.65 37.842,24.633
  pour cut-out: 32.113,27.472 32.119,27.478 32.708,27.478 32.708,27.222 32.385,26.9 32.21,26.9
  pour cut-out: 33.465,23.834 33.547,23.834 33.547,23.273 34.047,22.772 34.817,22.772 35.287,23.243 35.287,23.834 35.37,23.834 35.37,23.199 34.862,22.691 34.028,22.691 33.465,23.253
  pour cut-out: 32.868,24.435 36.601,24.435 36.601,23.774 32.868,23.774
  pour cut-out: 8.3,20.694 8.318,20.676 9.296,20.676 9.296,20.828 9.55,21.082 9.804,21.082 9.804,19.905 9.771,19.871 9.648,19.994 8.3,19.994
  pour cut-out: 32.537,25.044 32.893,25.044 32.893,24.892 32.537,24.892
  pour cut-out: 32.309,25.476 32.664,25.476 32.664,25.324 32.309,25.324
Layer 1:
  pour cut-out: 32.309,24.867 32.868,24.867 32.868,24.486 32.893,24.46 35.916,24.46 35.916,23.774 32.309,23.774
  pour cut-out: 35.31,23.824 35.31,23.237 34.827,22.755 34.823,22.758 34.041,22.758 34.041,22.76 33.557,23.245 33.557,23.824
Layer 2:
  pour cut-out: 33.553,23.885 35.298,23.864 35.299,23.885 35.298,23.284 34.823,22.809 34.025,22.809 34.025,22.817 33.547,23.295 33.553,23.3
  pour cut-out: 32.309,24.867 32.868,24.867 32.868,24.486 32.893,24.46 35.966,24.46 35.966,23.774 32.309,23.774

## Silkscreen, mask and mechanical layers (free items; w line width, h text height)
Top Overlay:
  drawing of 166 lines, arcs and shapes, not listed
  text "3V3" at 10.828,43.34 h0.8
  text "3V" at 15.4,43.34 h0.8
  text "GND" at 38.28,42.979 h0.8
  text "06" at 22.278,42.852 h0.8
  text "04" at 24.818,42.852 h0.8
  text "02" at 27.358,42.852 h0.8
  text "14" at 29.898,42.852 h0.8
  text "12" at 32.438,42.852 h0.8
  text "10" at 34.978,42.852 h0.8
  text "08" at 19.718,42.832 h0.8
  text "VCC" at 38.407,36.121 h0.8
  text "05" at 22.377,35.799 h0.8
  text "07" at 19.681,35.737 h0.8
  text "03" at 24.818,35.74 h0.8
  text "13" at 30.152,35.74 h0.8
  text "11" at 32.692,35.74 h0.8
  text "09" at 34.978,35.74 h0.8
  text "1" at 23.876,33.655 h1
  text "PORT" at 19.631,33.601 h1
  text "TDO" at 19.39,14.465 h0.8
  text "TDI" at 22.567,14.434 h0.8
  text "RST" at 25.361,14.434 h0.8
  text "CLK" at 25.341,12.382 h0.8
  text "DIO" at 19.446,12.346 h0.8
  text "Port" at 34.703,8.99 h1
  text "Port" at 19.611,8.943 h1
  text "2" at 23.241,8.89 h1
  text "0" at 38.1,8.89 h1
  text "03" at 22.278,7.038 h0.8
  text "05" at 24.818,7.038 h0.8
  text "07" at 27.358,7.038 h0.8
  text "09" at 29.898,7.038 h0.8
  text "01" at 34.978,7.038 h0.8
  text "03" at 37.518,7.038 h0.8
  text "3.3V" at 39.931,7.038 h0.8
  text "01" at 19.718,7.018 h0.8
  text "00" at 19.738,0.688 h0.8
  text "02" at 22.278,0.688 h0.8
  text "04" at 24.818,0.688 h0.8
  text "06" at 27.358,0.688 h0.8
  text "08" at 29.898,0.688 h0.8
  text "10" at 32.438,0.688 h0.8
  text "00" at 34.978,0.688 h0.8
  text "02" at 37.518,0.688 h0.8
  text "04" at 40.058,0.688 h0.8
Bottom Overlay:
  text "github.com/Nandish-KK" at 44.25,42.781 h1.25
Mechanical 1:
  lines w0.025: 0,0.143 0,16 ; 0,0.254 0,0 ccw(c1,0) 1,-1 45,-1 ccw(c45,0) 46,0 46,44 ccw(c45,44) 45,45 1,45 ccw(c1.05,43.95) 0,43.9 ; 0,16.002 0,16.151 cw(c0.867,16.151) 0.254,16.764 cw(c0.867,16.151) 0.867,17.018 1.016,17.018 6.985,17.018 6.985,26.162 0.867,26.162 cw(c0.867,27.029) 0.254,26.416 cw(c0.867,27.029) 0,27.029 ; 0,27 0,43.75 0,44 ; 62.2,71 cw(c62.2,70) 63.2,70